# Altium PCB PCB1.PcbDoc (part 1 of 2)
Units mm, origin at the board's own origin, x right, y up, seen from the top; angles counter-clockwise.
Board outline 95 x 95 mm, 2 copper layers (Top Layer, Bottom Layer); 186 components, 106 nets, 634 pads, 261 vias.
Unrouted connection lines stored in the file: 17.
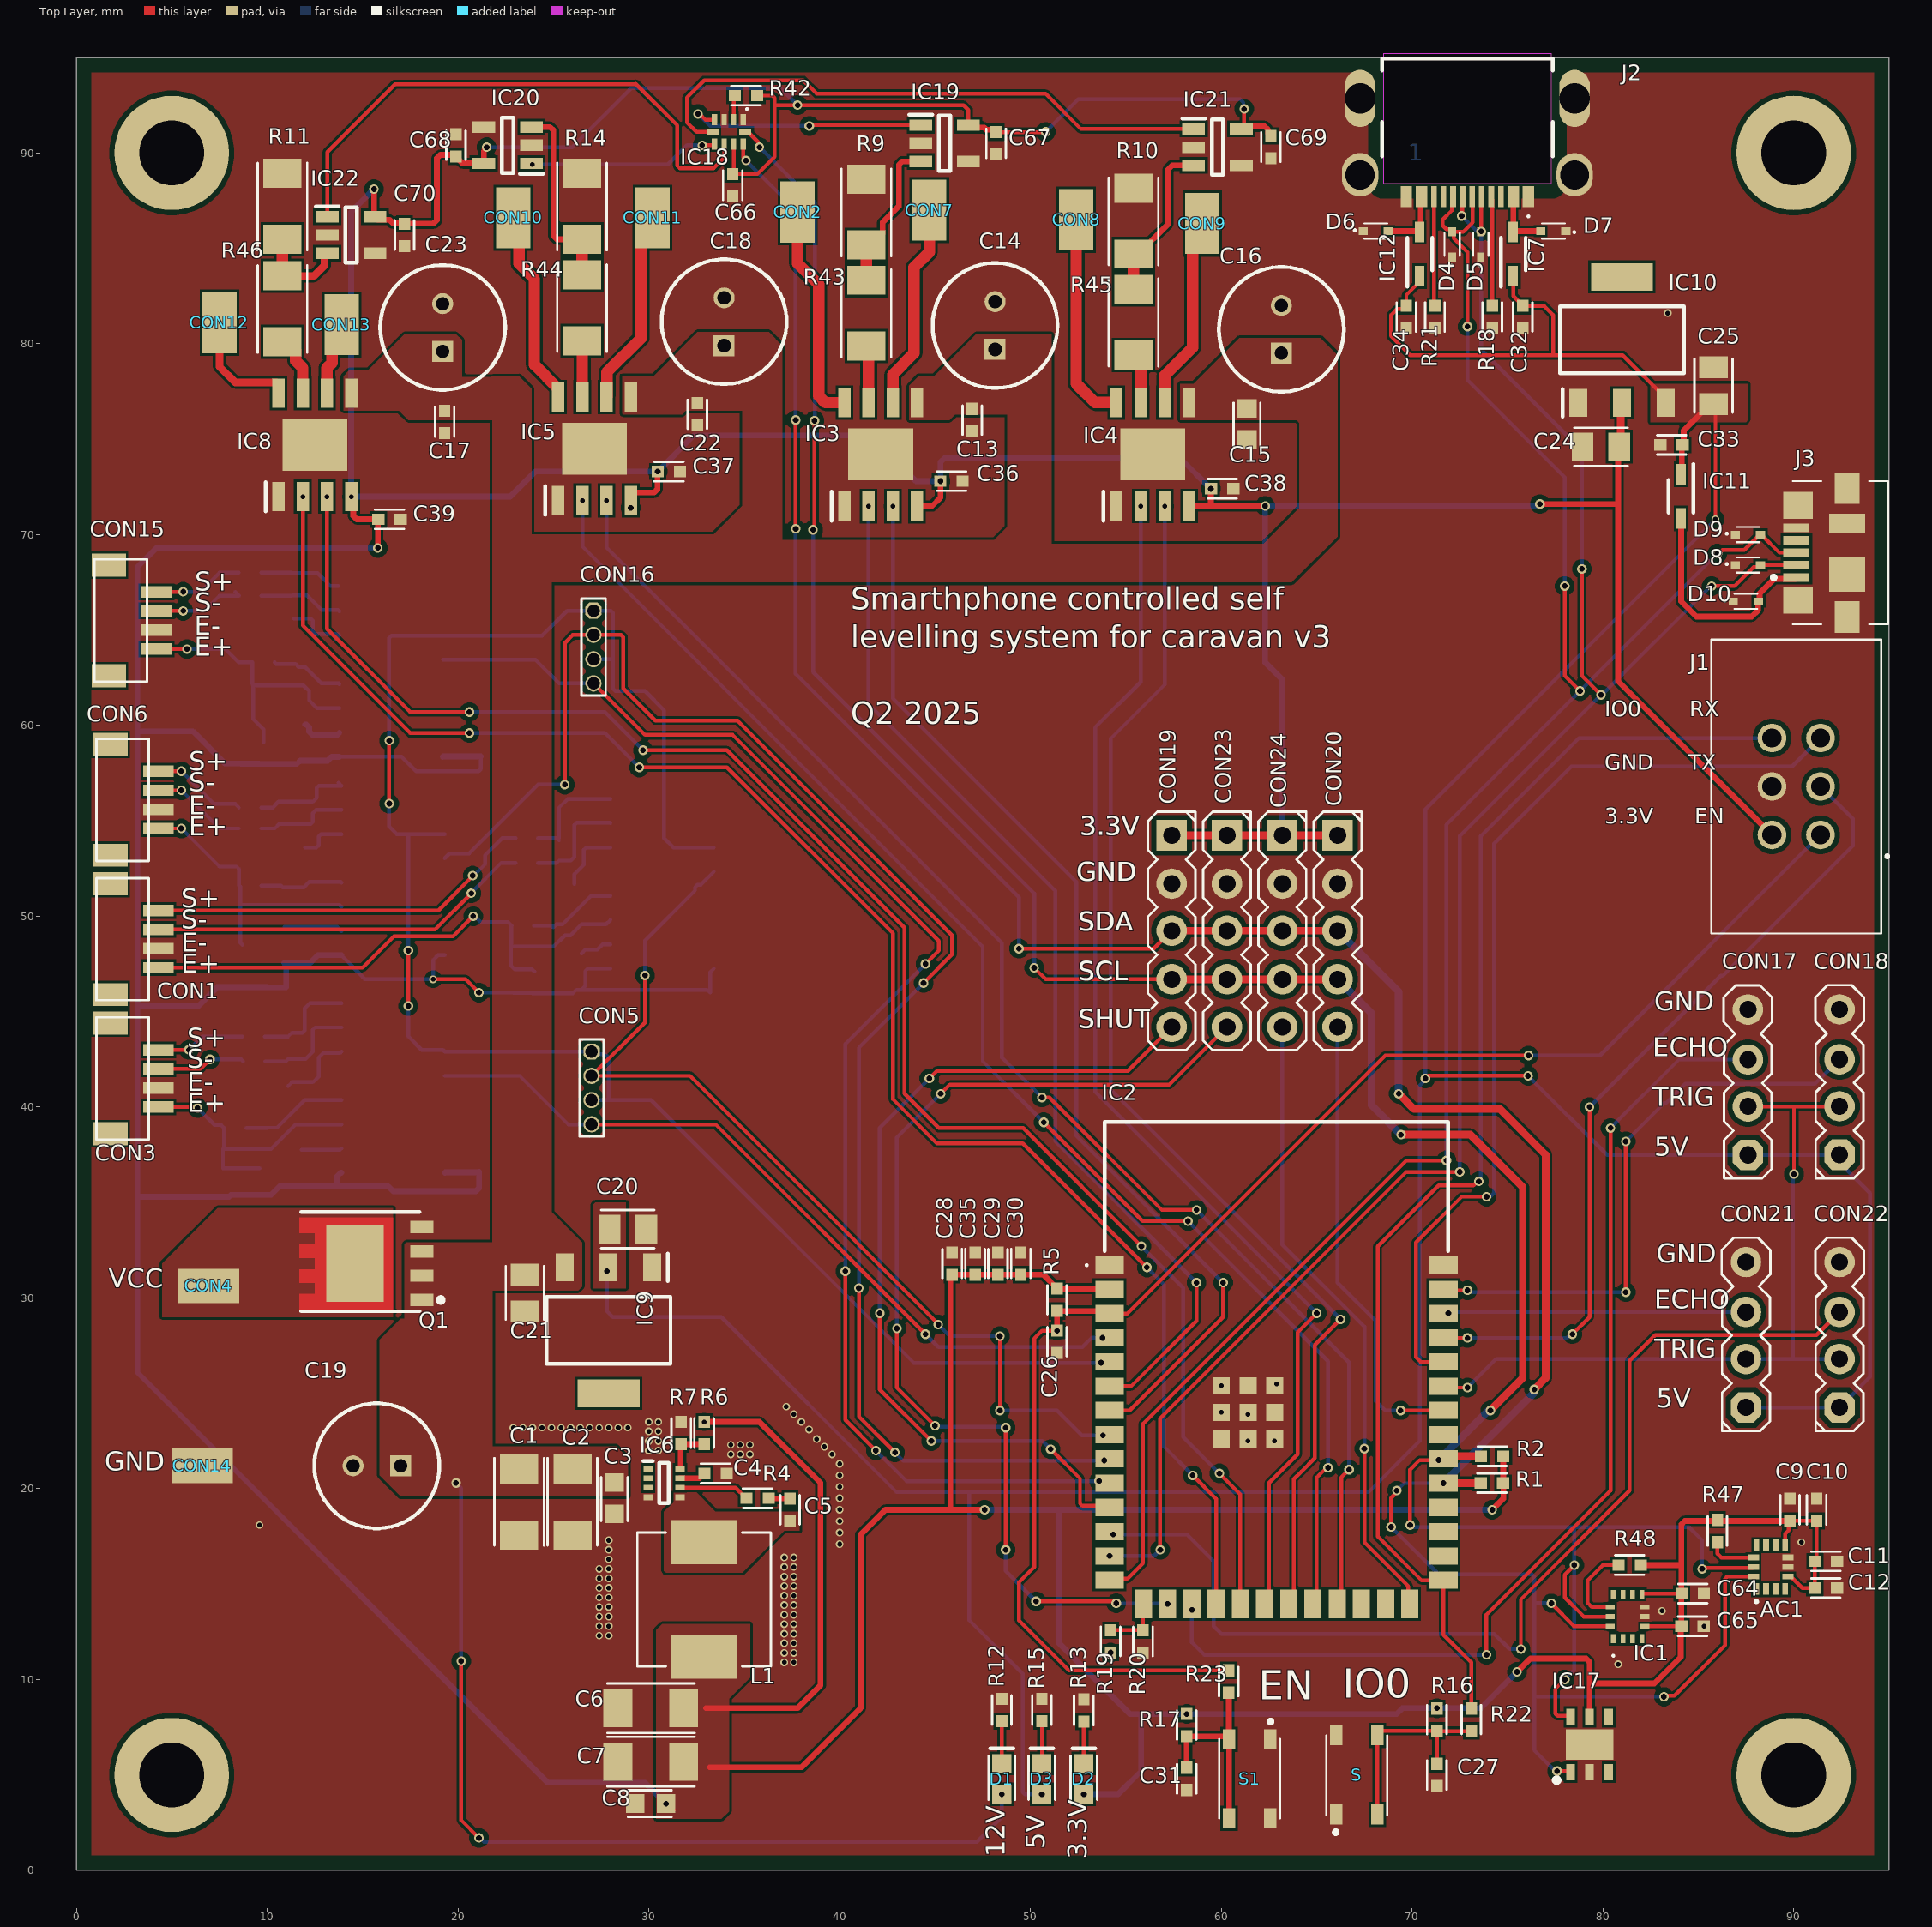
[diagram p0: Top Layer view]
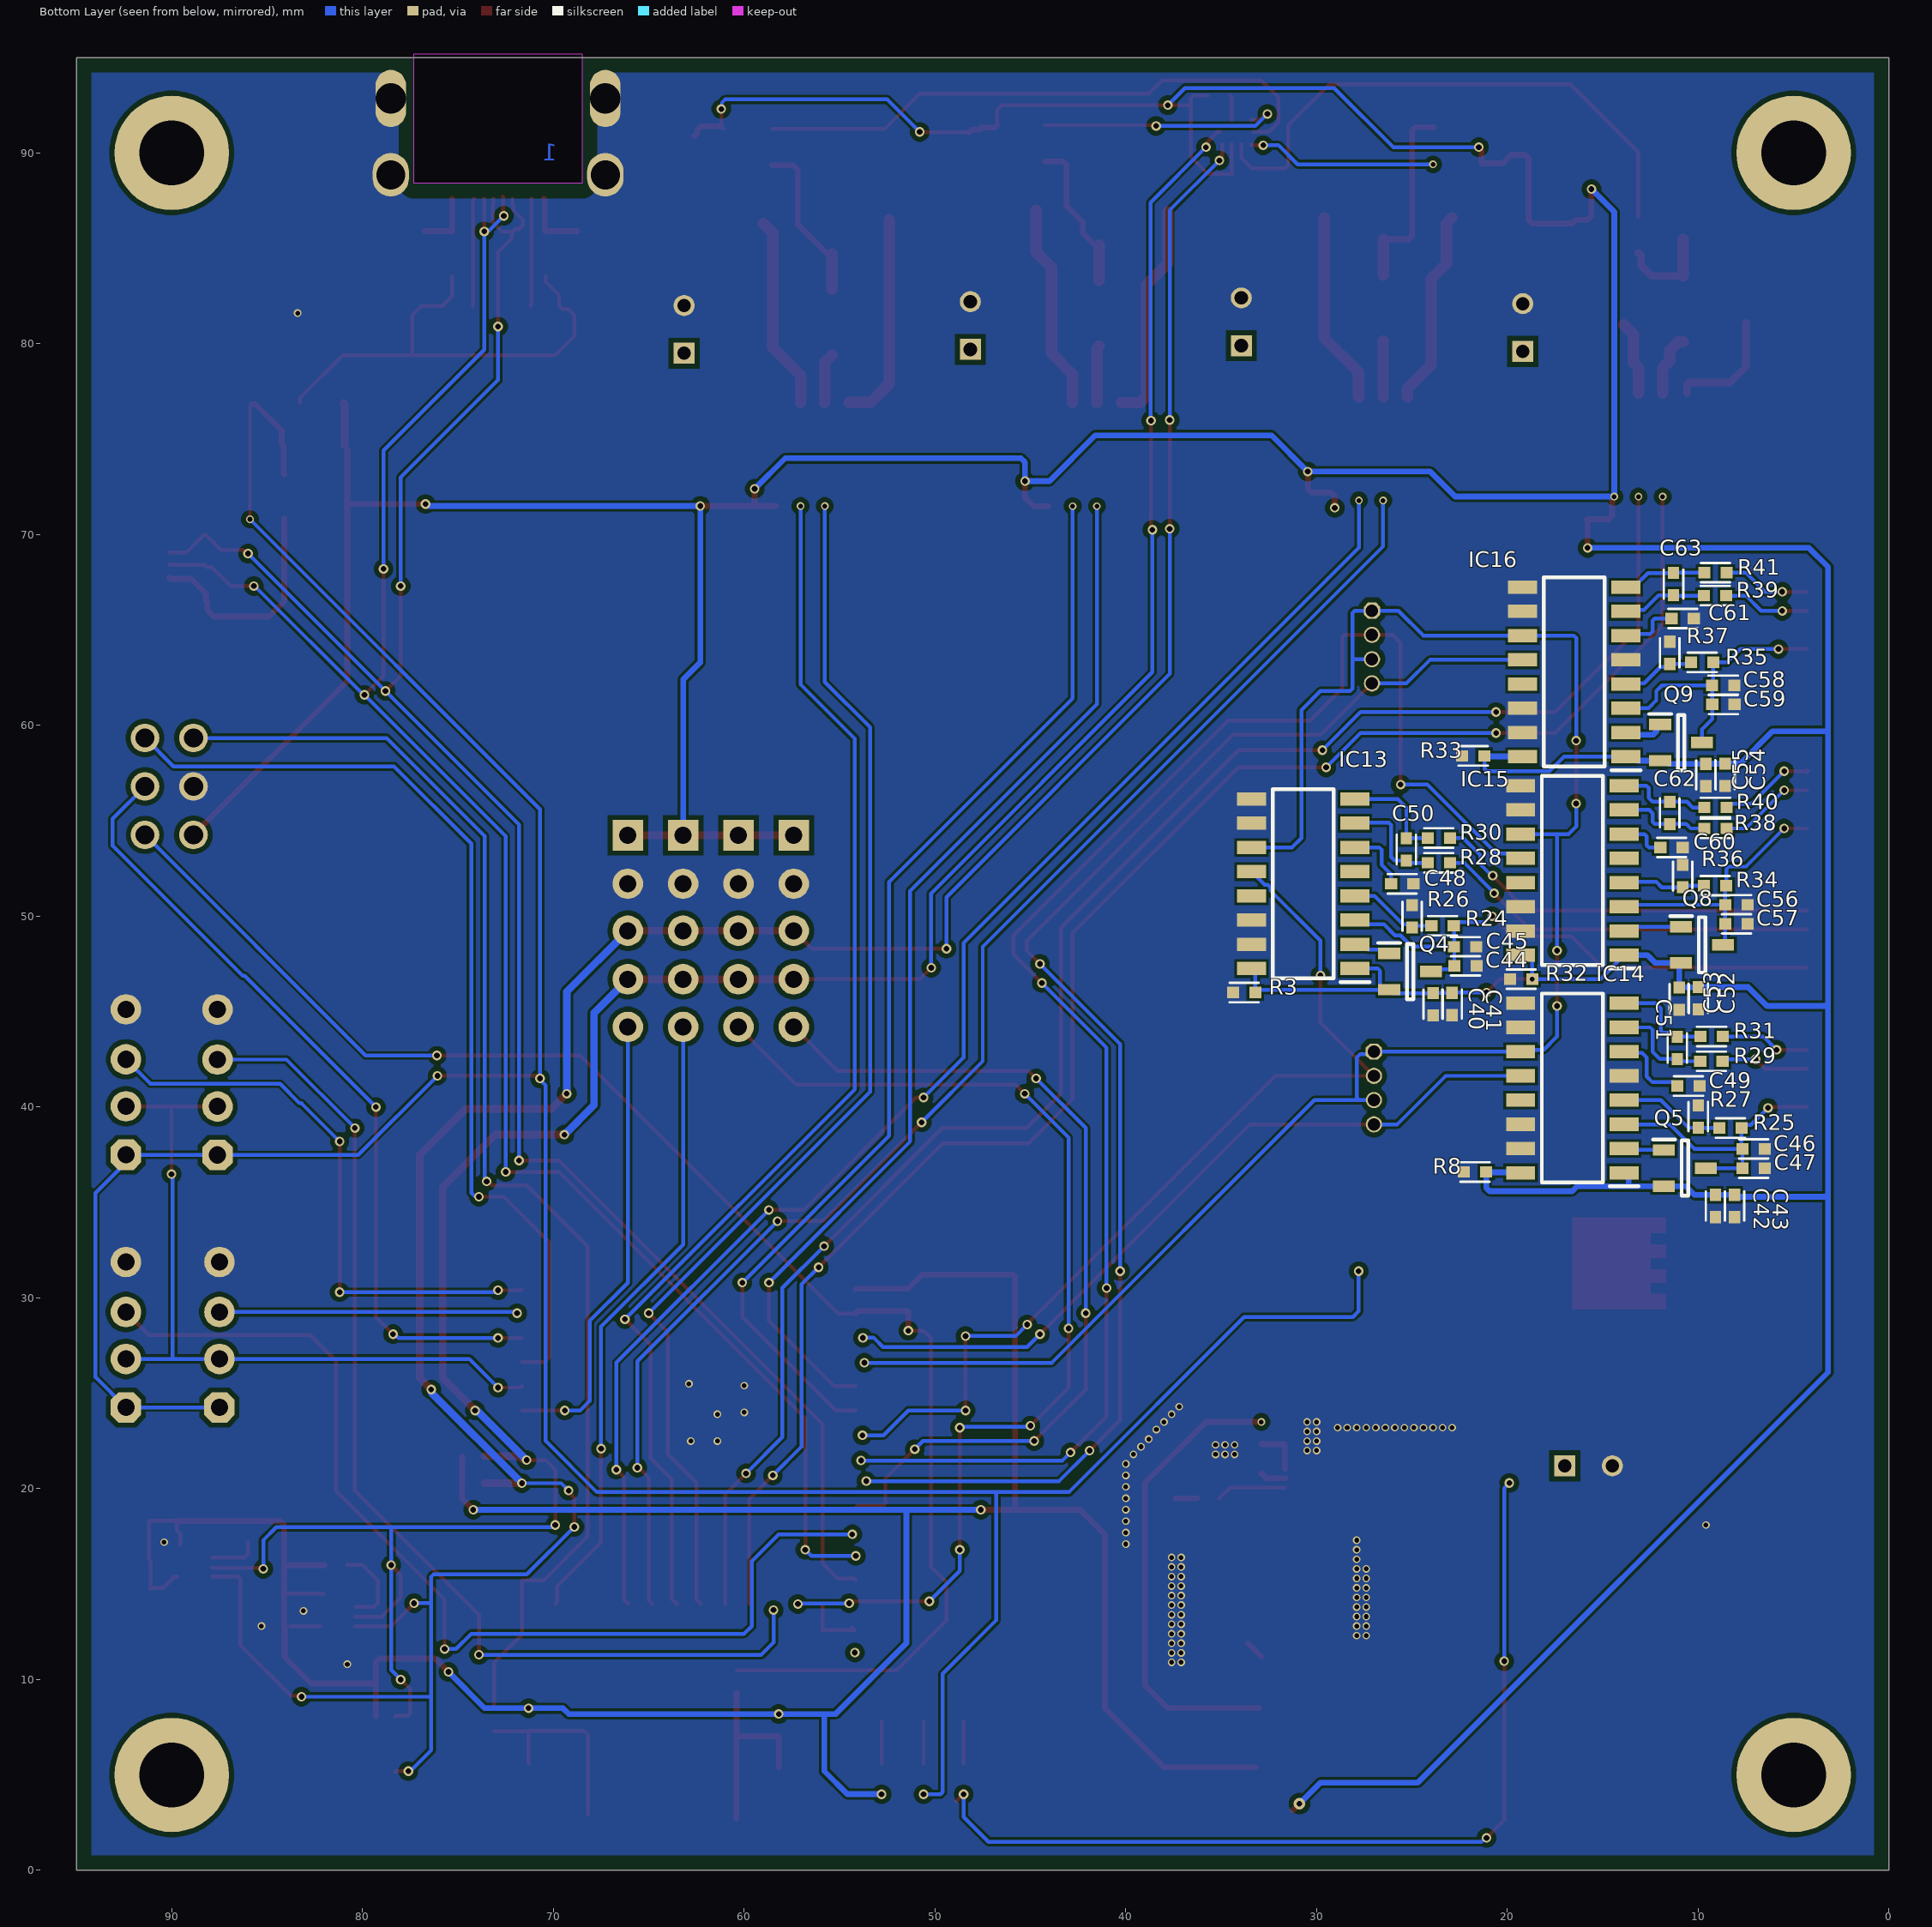
[diagram p1: Bottom Layer view, seen from below]
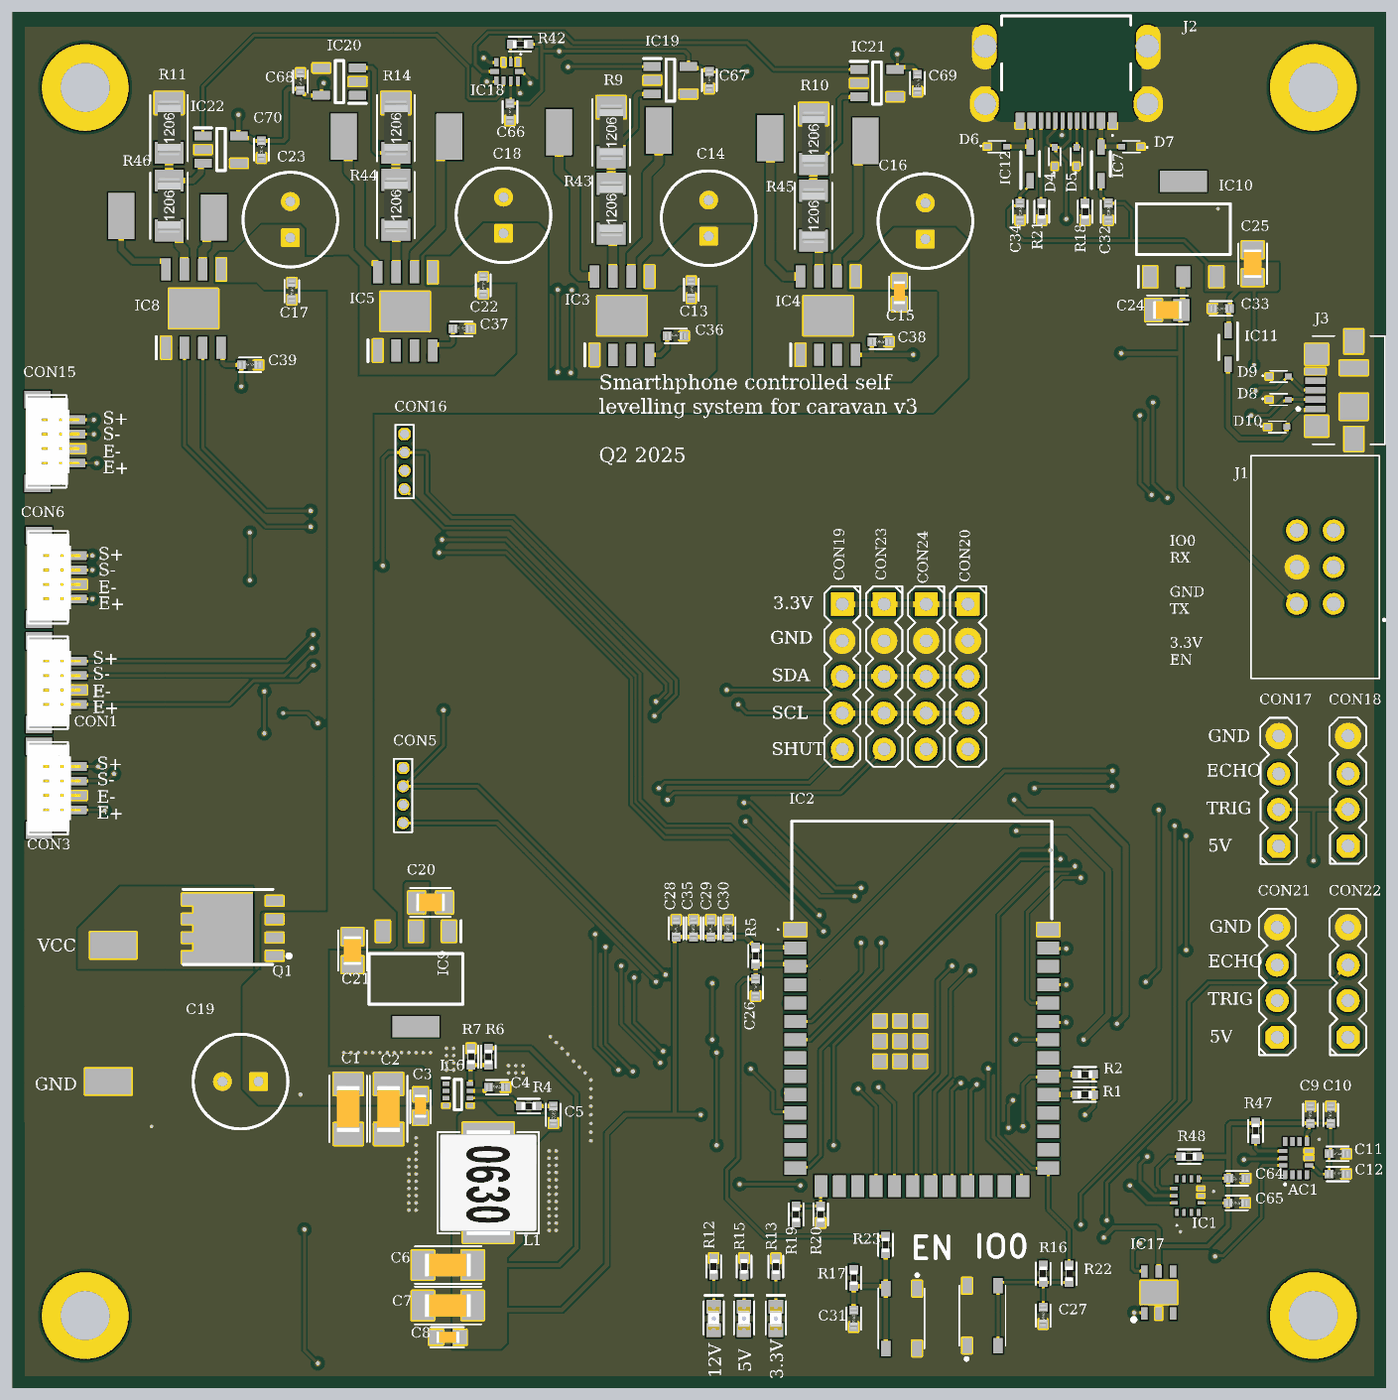
[diagram p3: 3D render of the assembled board from above, using the file's embedded part models]
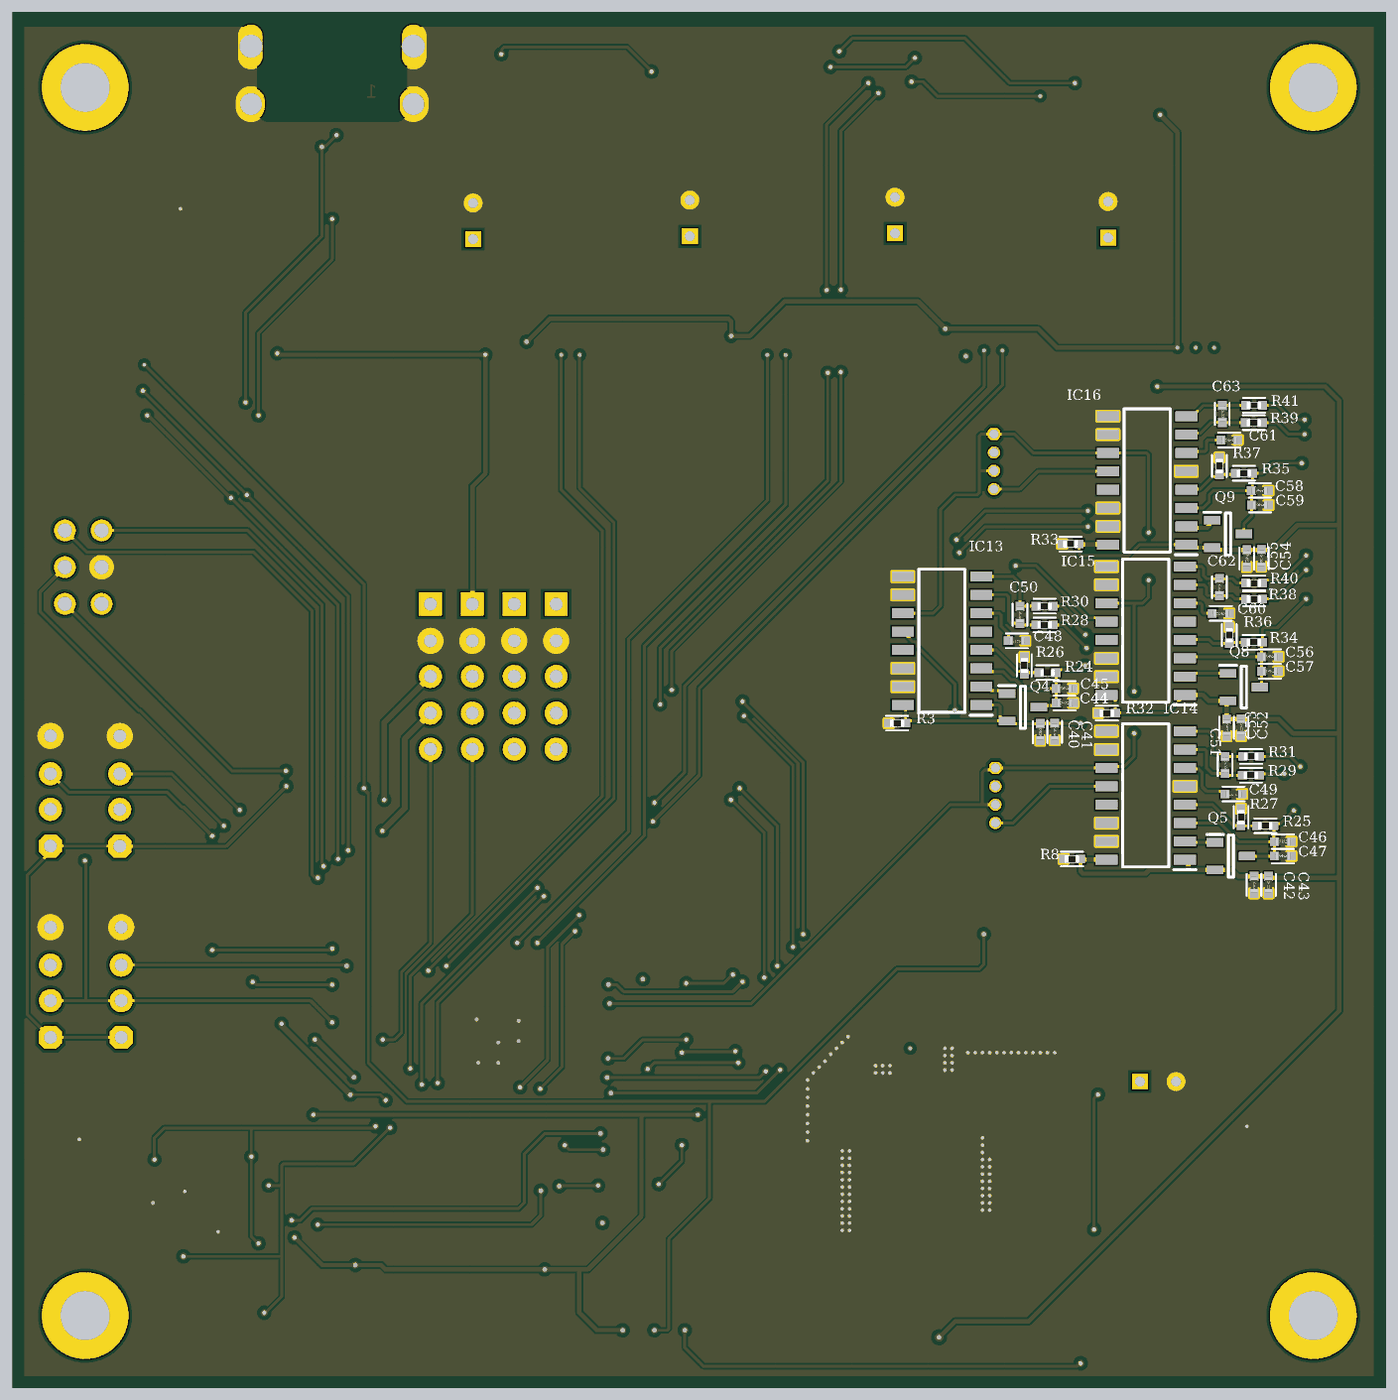
[diagram p4: 3D render of the assembled board from below, using the file's embedded part models]

## Layer stack, top to bottom
Top Solder: solder mask 0.0102, Solder Resist, Dk 3.5
Top Layer: signal copper 0.0356
Dielectric 1: dielectric 0.32, FR-4, Dk 4.8
Bottom Layer: signal copper 0.0356
Bottom Solder: solder mask 0.0102, Solder Resist, Dk 3.5

## Board outline
0,0 95,0 95,95 0,95
cut-out: 68.5,95.2 68.5,88.4 77.3,88.4 77.3,95.2

## Design rules (kind name [scope] priority, off if disabled: settings)
BoardOutlineClearance [All] p1: gap=0.8 ignorepadtopadclearanceinfootprint=FALSE
Clearance [All] p1: gap=0.127 ignorepadtopadclearanceinfootprint=TRUE except(0.2: Arc-THPad Track-THPad SMDPad-THPad; 0.254: THPad-Fill THPad-Poly THPad-Region Via-Fill Via-Poly Via-Region; 0.33: Arc-Hole Track-Hole SMDPad-Hole THPad-Hole Via-Hole Fill-Hole Poly-Hole Region-Hole; 0.5: THPad-THPad)
HoleSize [All] p1: absolutevalues=TRUE maxlimit=4 minlimit=0.02 maxpercent=80.000 minpercent=20.000
HoleToHoleClearance [All] p1: gap=0.127 allowstackedmicrovias=TRUE
PlaneClearance [All] p1: clearance=0.3
PlaneConnect PlaneConnect_1 [(HasFootprint('R 2512'))] p1: planeconnectstyle=Relief reliefexpansion=0.508 reliefentries=4 reliefconductorwidth=0.254 reliefairgap=0.254
PlaneConnect [All] p2: planeconnectstyle=Relief reliefexpansion=0.508 reliefentries=4 reliefconductorwidth=0.254 reliefairgap=0.254
PolygonConnect "Polygon Power Connection" [(HasFootprint('DFN 5x6')) OR  (HasFootprint('R 2512')) OR  IsVia OR  HasFootprint('SMD PAD')  OR  (HasFootprint('DJNR60454R5FERROCORE'))  OR  (HasFootprint ('SON50P200X200X80-9N-D')) OR (HasFootprint('SOT230P700X180-4N'))  OR    InNetClass('Power')] p1: connectstyle=Direct reliefconductorwidth=0.254 reliefentries=4 polygonreliefangle="90 Angle" airgapwidth=0.254 // Conection to high power components
PolygonConnect [All] p2: connectstyle=Direct reliefconductorwidth=0.254 reliefentries=4 polygonreliefangle="90 Angle" airgapwidth=0.254
RoutingVias [All] p1: holewidth=0.3 width=0.5 viastyle="Through Hole" minholewidth=0.2 minwidth=0.3 maxholewidth=1 maxwidth=1.27
SilkToSilkClearance [All] p1: silktosilkclearance=0.127
SolderMaskExpansion "Tented Vias" [IsVia] p1: expansion=0.102 istentingtop=TRUE
SolderMaskExpansion [All] p2: expansion=0.102 istentingtop=FALSE
Width [All] p1: maxlimit=1 minlimit=0.127 preferedwidth=0.3 minimp=50.000000 maximp=50.000000 favimp=50.000000
25 further rules are at their usual default settings.

## Classes and differential pairs
component class Sensors: AC1 C9 C10 C11 C12 C64 C65 CON17 CON18 CON19 CON20 CON21 CON22 CON23 CON24 IC1 IC17 R47 R48
component class Amplifiers2: C52 C53 C54 C55 C56 C57 C58 C59 C60 C61 C62 C63 CON6 CON15 CON16 IC15 IC16 Q8 Q9 R32 R33 R34 R35 R36 R37 R38 R39 R40 R41
component class Amplifiers1: C40 C41 C42 C43 C44 C45 C46 C47 C48 C49 C50 C51 CON1 CON3 CON5 IC13 IC14 Q4 Q5 R3 R8 R24 R25 R26 R27 R28 R29 R30 R31
component class INTERFACE: C32 C33 C34 D4 D5 D6 D7 D8 D9 D10 IC7 IC11 IC12 J1 J2 J3 R18 R21
component class MCU: C26 C27 C28 C29 C30 C31 C35 C66 IC2 IC18 R1 R2 R5 R16 R17 R19 R20 R22 R23 R42 S S1
component class DC_DRIVERS: C13 C14 C15 C16 C17 C18 C22 C23 C36 C37 C38 C39 C67 C68 C69 C70 CON2 CON7 CON8 CON9 CON10 CON11 CON12 CON13 IC3 IC4 IC5 IC8 IC19 IC20 IC21 IC22 R9 R10 R11 R14 R43 R44 R45 R46
component class DC-DC: C1 C2 C3 C4 C5 C6 C7 C8 C19 C20 C21 C24 C25 CON4 CON14 D1 D2 D3 IC6 IC9 IC10 L1 Q1 R4 R6 R7 R12 R13 R15

## Components (designator, comment, footprint, x,y, rotation, side; value= is the part's Value field where it differs from the comment)
AC1 "LSM6DSOXTR" LGA-14_1 88.8,15.9 r90 top
C1 "10uF" "C 1206" 23.2,19.3 r270 top
C2 "10uF" "C 1206" 26,19.3 r270 top
C3 "100nF" "C 0603" 28.2,19.5 r270 top
C4 "33nF" "C 0402" 33.5,20.8 r0 top
C5 "100nF" "C 0402" 37.4,18.9 r270 top
C6 "40uF" "C 1206" 30.1,8.5 r180 top
C7 "40uF" "C 1206" 30.1,5.7 r180 top
C8 "100nF" "C 0603" 30.1,3.5 r180 top
C9 "100nF" "C 0402" 89.8,18.9 r90 top
C10 "1uF" "C 0402" 91.2,18.9 r90 top
C11 "1uF" "C 0402" 91.684,16.2 r0 top
C12 "100nF" "C 0402" 91.684,14.8 r0 top
C13 "0.1uF" "C 0402" 46.95,76 r270 top
C14 "UVY1V101MED1TD" CAPPRD250W50D655H1250 48.15,79.7 r90 top
C15 "0.1uF" "C 0603" 61.35,75.8 r270 top
C16 "UVY1V101MED1TD" CAPPRD250W50D655H1250 63.15,79.5 r90 top
C17 "0.1uF" "C 0402" 19.3,75.9 r270 top
C18 "UVY1V101MED1TD" CAPPRD250W50D655H1250 33.95,79.9 r90 top
C19 "UVY1V101MED1TD" CAPPRD250W50D655H1250 17,21.2 r180 top
C20 "22uF" "C 0805" 28.9,33.6 r0 top
C21 "10uF" "C 0805" 23.5,30.265 r270 top
C22 "0.1uF" "C 0402" 32.55,76.3 r270 top
C23 "UVY1V101MED1TD" CAPPRD250W50D655H1250 19.2,79.6 r90 top
C24 "22uF" "C 0805" 79.9,74.6 r180 top
C25 "10uF" "C 0805" 85.8,77.8 r90 top
C26 "1uF" "C 0402" 51.4,27.7 r270 top
C27 "0.1uF" "C 0402" 71.3,5 r270 top
C28 "100nF" "C 0402" 45.9,31.8 r90 top
C29 "10uF" "C 0402" 48.3,31.8 r90 top
C30 "0.1uF" "C 0402" 49.5,31.8 r90 top
C31 "0.1uF" "C 0402" 58.188,4.797 r270 top
C32 "10uF" "C 0402" 75.8,81.4 r270 top
C33 "10uF" "C 0402" 83.6,74.7 r180 top
C34 "10uF" "C 0402" 69.7,81.4 r270 top
C35 "1uF" "C 0402" 47.1,31.8 r90 top
C36 "100nF" "C 0402" 45.866,72.8 r0 top
C37 "100nF" "C 0402" 31.05,73.3 r0 top
C38 "100nF" "C 0402" 60.05,72.4 r0 top
C39 "100nF" "C 0402" 16.416,70.8 r0 top
C40 "1uF" "C 0402" 23.9,45.384 r270 bottom
C41 "100nF" "C 0402" 22.9,45.4 r270 bottom
C42 "1uF" "C 0402" 9.1,34.816 r270 bottom
C43 "100nF" "C 0402" 8.1,34.816 r270 bottom
C44 "100nF" "C 0402" 22.2,47.4 r180 bottom
C45 "10uF" "C 0402" 22.216,48.4 r180 bottom
C46 "100nF" "C 0402" 7.1,37.8 r180 bottom
C47 "10uF" "C 0402" 7.1,36.8 r180 bottom
C48 "100nF" "C 0402" 25.516,51.7 r0 bottom
C49 "100nF" "C 0402" 10.516,41.1 r0 bottom
C50 "100nF" "C 0402" 25.3,53.5 r270 bottom
C51 "100nF" "C 0402" 11.1,43.1 r270 bottom
C52 "1uF" "C 0402" 10,45.7 r270 bottom
C53 "100nF" "C 0402" 11,45.684 r270 bottom
C54 "1uF" "C 0402" 9.6,57.4 r270 bottom
C55 "100nF" "C 0402" 8.6,57.416 r270 bottom
C56 "100nF" "C 0402" 8,50.6 r180 bottom
C57 "10uF" "C 0402" 8,49.6 r180 bottom
C58 "100nF" "C 0402" 8.7,62.1 r180 bottom
C59 "10uF" "C 0402" 8.684,61.1 r180 bottom
C60 "100nF" "C 0402" 11.4,53.6 r0 bottom
C61 "100nF" "C 0402" 10.816,65.6 r0 bottom
C62 "100nF" "C 0402" 11.5,55.416 r270 bottom
C63 "100nF" "C 0402" 11.3,67.4 r270 bottom
C64 "100nF" "C 0402" 84.716,14.5 r180 top
C65 "100nF" "C 0402" 84.7,12.8 r0 top
C66 "0.1uF" "C 0402" 34.4,88.3 r270 top
C67 "100nF" "C 0402" 48.2,90.5 r270 top
C68 "100nF" "C 0402" 19.9,90.4 r90 top
C69 "100nF" "C 0402" 62.6,90.3 r270 top
C70 "100nF" "C 0402" 17.2,85.7 r270 top
CON1 "4 PIN" BM04B-SRSS-TB 2.8,48.8 r90 top
CON2 "1 Pin" "SMD PAD" 37.8,86.9 r180 top
CON3 "4 PIN" BM04B-SRSS-TB 2.8,41.5 r90 top
CON4 "1 Pin" "SMD PAD" 6.942,30.628 r270 top
CON5 "4 PIN" "Goldpin 1.27mm 4PIN" 27,41 r270 top
CON6 "4 PIN" BM04B-SRSS-TB 2.8,56.1 r90 top
CON7 "1 Pin" "SMD PAD" 44.7,87 r180 top
CON8 "1 Pin" "SMD PAD" 52.4,86.5 r180 top
CON9 "1 Pin" "SMD PAD" 59,86.3 r180 top
CON10 "1 Pin" "SMD PAD" 22.9,86.6 r180 top
CON11 "1 Pin" "SMD PAD" 30.2,86.6 r180 top
CON12 "1 Pin" "SMD PAD" 7.5,81.1 r180 top
CON13 "1 Pin" "SMD PAD" 13.9,81 r180 top
CON14 "1 Pin" "SMD PAD" 6.6,21.2 r270 top
CON15 "4 PIN" BM04B-SRSS-TB 2.7,65.5 r90 top
CON16 "4 PIN" "Goldpin 1.27mm 4PIN" 27.1,64.105 r270 top
CON17 "4 PIN" "Goldpin 2.54 4P" 87.6,41.3 r90 top
CON18 "4 PIN" "Goldpin 2.54 4P" 92.4,41.31 r90 top
CON19 "5 PIN" "Goldpin 2.54mm  5Pin" 57.4,49.24 r270 top
CON20 "5 PIN" "Goldpin 2.54mm  5Pin" 66.1,49.24 r270 top
CON21 "4 PIN" "Goldpin 2.54 4P" 87.5,28.07 r90 top
CON22 "4 PIN" "Goldpin 2.54 4P" 92.4,28.07 r90 top
CON23 "5 PIN" "Goldpin 2.54mm  5Pin" 60.3,49.24 r270 top
CON24 "5 PIN" "Goldpin 2.54mm  5Pin" 63.2,49.24 r270 top
D1 "LED BLUE" "LED 0603 BLUE" 48.5,4.8 r90 top
D2 "LED BLUE" "LED 0603 BLUE" 52.8,4.8 r90 top
D3 "LED BLUE" "LED 0603 BLUE" 50.6,4.8 r90 top
D4 "LESD5D5.0CT1G" LESD5D50CT1G 72.1,85.2 r90 top
D5 "LESD5D5.0CT1G" LESD5D50CT1G 73.6,85.2 r90 top
D6 "LESD5D5.0CT1G" LESD5D50CT1G 68.1,85.9 r0 top
D7 "LESD5D5.0CT1G" LESD5D50CT1G 77.4,85.9 r180 top
D8 "LESD5D5.0CT1G" LESD5D50CT1G 87.6,68.4 r0 top
D9 "LESD5D5.0CT1G" LESD5D50CT1G 87.6,70 r0 top
D10 "LESD5D5.0CT1G" LESD5D50CT1G 87.5,66.5 r0 top
IC1 "BMI323" BMI323 81.3,13.3 r90 top
IC2 "ESP32-S3-WROOM-1-N16R8" ESP32S3WROOM1N16R8 62.9,26.46 r0 top
IC3 "DRV8251DDAR" SOIC127P600X170-9N 42.15,74.2 r90 top
IC4 "DRV8251DDAR" SOIC127P600X170-9N 56.411,74.206 r90 top
IC5 "DRV8251DDAR" SOIC127P600X170-9N 27.15,74.5 r90 top
IC6 "TPS62933DRLR" SOTFL50P160X60-8N 30.8,20.3 r0 top
IC7 "BAT760-7" SOD2513X120N 75.3,84.7 r90 top
IC8 "DRV8251DDAR" SOIC127P600X170-9N 12.5,74.7 r90 top
IC9 "AMS1117-5" SOT229P700X180-4N 27.89,28.3 r270 top
IC10 "AMS1117-3.3" SOT229P700X180-4N 81,80.2 r90 top
IC11 "BAT760-7" SOD2513X120N 84.1,72 r270 top
IC12 "BAT760-7" SOD2513X120N 70.4,84.7 r90 top
IC13 "HX711" SOIC127P600X160-16N 30.7,51.7 r0 bottom
IC14 "HX711" SOIC127P600X160-16N 16.6,41 r0 bottom
IC15 "HX711" SOIC127P600X160-16N 16.6,52.4 r0 bottom
IC16 "HX711" SOIC127P600X160-16N 16.5,62.8 r0 bottom
IC17 "HDC1080DMBR" SON100P300X300X80-7N-D 79.3,6.6 r90 top
IC18 "ADS1115IRUGR" ADS1115IRUGR 34.2,91.1 r180 top
IC19 "INA180A2IDBVR" SOT95P280X145-5N 45.5,90.5 r0 top
IC20 "INA180A2IDBVR" SOT95P280X145-5N 22.6,90.4 r180 top
IC21 "INA180A2IDBVR" SOT95P280X145-5N 59.8,90.3 r0 top
IC22 "INA180A2IDBVR" SOT95P280X145-5N 14.4,85.7 r0 top
J1 "09185066324" 09185066324 91.4,54.26 r90 top
J2 "USB4500-03-0-A" USB4500030A 72.9,91.7 r180 top
J3 "0473461001" 0473461001 92.115,69.05 r90 top
L1 "4.7uH" HPI0630 32.9,14.2 r270 top
Q1 "AON6403" "DFN 5x6" 15.2,31.8 r90 top
Q4 "S8550" SOT95P240X110-3N 25.1,47.1 r180 bottom
Q5 "S8550" SOT95P240X110-3N 10.7,36.8 r180 bottom
Q8 "S8550" SOT95P240X110-3N 9.8,48.5 r180 bottom
Q9 "S8550" SOT95P240X110-3N 10.9,59.1 r180 bottom
R1 "10k" "R 0402" 74.184,20.3 r0 top
R2 "10k" "R 0402" 74.2,21.7 r0 top
R3 "10k" "R 0402" 33.8,46 r180 bottom
R4 "0" "R 0402" 35.7,19.5 r180 top
R5 "10k" "R 0402" 51.4,29.9 r90 top
R6 "31.3K" "R 0402" 32.9,22.916 r270 top
R7 "10K" "R 0402" 31.7,22.916 r270 top
R8 "10k" "R 0402" 21.7,36.6 r180 bottom
R9 "0.05R" "R 1206" 41.4,86.9 r90 top
R10 "0.05R" "R 1206" 55.4,86.427 r90 top
R11 "0.05R" "R 1206" 10.8,87.2 r90 top
R12 "2k" "R 0402" 48.5,8.4 r270 top
R13 "160" "R 0402" 52.8,8.384 r270 top
R14 "0.05R" "R 1206" 26.5,87.2 r90 top
R15 "160" "R 0402" 50.6,8.4 r270 top
R16 "10k" "R 0402" 71.3,7.9 r90 top
R17 "10k" "R 0402" 58.188,7.613 r90 top
R18 "10k" "R 0402" 74.2,81.4 r90 top
R19 "47k" "R 0402" 54.2,12 r270 top
R20 "13k" "R 0402" 55.9,12 r90 top
R21 "10k" "R 0402" 71.2,81.4 r90 top
R22 "100R" "R 0402" 73.1,7.9 r270 top
R23 "100R" "R 0402" 60.387,9.897 r270 top
R24 "20k" "R 0402" 23.4,49.5 r180 bottom
R25 "20k" "R 0402" 8.316,38.9 r180 bottom
R26 "8.2k" "R 0402" 25,50 r270 bottom
R27 "8.2k" "R 0402" 10,39.5 r270 bottom
R28 "100R" "R 0402" 23.6,52.8 r180 bottom
R29 "100R" "R 0402" 9.316,42.4 r180 bottom
R30 "100R" "R 0402" 23.6,54.1 r180 bottom
R31 "100R" "R 0402" 9.3,43.7 r180 bottom
R32 "10k" "R 0402" 19.284,46.7 r180 bottom
R33 "10k" "R 0402" 21.8,58.4 r180 bottom
R34 "20k" "R 0402" 9.116,51.6 r180 bottom
R35 "20k" "R 0402" 9.8,63.3 r180 bottom
R36 "8.2k" "R 0402" 10.816,52.1 r270 bottom
R37 "8.2k" "R 0402" 11.5,63.8 r270 bottom
R38 "100R" "R 0402" 9.1,54.6 r180 bottom
R39 "100R" "R 0402" 9.116,66.8 r180 bottom
R40 "100R" "R 0402" 9.1,55.7 r180 bottom
R41 "100R" "R 0402" 9.1,68 r180 bottom
R42 "10k" "R 0402" 35.1,93 r0 top
R43 "0.05R" "R 1206" 41.4,81.6 r90 top
R44 "0.05R" "R 1206" 26.5,81.873 r90 top
R45 "0.05R" "R 1206" 55.4,81.127 r90 top
R46 "0.05R" "R 1206" 10.8,81.827 r90 top
R47 "0R" "R 0402" 86,17.784 r90 top
R48 "0R" "R 0402" 81.4,16 r0 top
S "PTS810SJK250SMTRLFS" PTS810SJG250SMTRLFS 67.1,5 r90 top
S1 "PTS810SJK250SMTRLFS" PTS810SJG250SMTRLFS 61.487,4.797 r270 top

## Footprints (in the part's own frame and the unit in brackets; to place one, negate y for a bottom-side part, rotate by r counter-clockwise, add the part's x,y. Pads: shape width x height; smd on the part's side, far side on the other; paste and mask are expansions set on the pad)
0473461001 [mm]
  rect 0.45x1.38 smd: 1(-1.3,1.975) 2(-0.65,1.975) 3(0,1.975) 4(0.65,1.975) 5(1.3,1.975)
  rect 1.425x1.55 smd: MP1(-2.487,1.89) MP2(2.487,1.89)
  rect 1.65x1.3 smd: MP3(-3.375,-0.685) MP6(3.375,-0.685)
  rect 1.8x1.9 smd: MP4(-1.15,-0.685)
  rect 1x1.9 smd: MP5(1.55,-0.685)
  silkscreen extent -3.75,-2.84 3.75,3.26, body extent -3.9,-2.5 3.9,2.5, height 2.72
09185066324 [mm]
  round 1.5 hole 1: 1(0,0) 2(0,2.54) 3(2.54,0) 4(2.54,2.54) 5(5.08,0) 6(5.08,2.54)
  silkscreen extent -5.16,-3.55 10.24,5.72, body extent -5.16,-3.21 10.24,5.99, height 9.31
ADS1115IRUGR [mm]
  rect 0.3x0.575 smd: 1(-0.75,-0.638) 4(0.75,-0.638) 6(0.75,0.638) 9(-0.75,0.638)
  rect 0.25x0.575 smd: 2(-0.25,-0.638) 3(0.25,-0.638) 7(0.25,0.638) 8(-0.25,0.638)
  rect 0.63x0.35 smd: 5(0.86,0) 10(-0.86,0)
  silkscreen extent -1,-1.25 -0.9,-1.15, body extent -1,-0.75 1,0.75, height 0.4
BM04B-SRSS-TB [mm]
  rect 0.6x1.6 smd: 1(-1.5,-1.5) 2(-0.5,-1.5) 3(0.5,-1.5) 4(1.5,-1.5)
  rect 1.2x1.8 smd: A(-2.9,1) B(2.9,1)
  silkscreen extent -3.2,-1 3.2,1.75, body extent -3,-1.9 3,1.7, height 4.25
BMI323 [mm]
  rect 0.475x0.25 smd: 1(-1.163,0.75) 2(-1.163,0.25) 3(-1.163,-0.25) 4(-1.163,-0.75) 8(1.163,-0.75) 9(1.163,-0.25) 10(1.163,0.25) 11(1.163,0.75)
  rect 0.25x0.475 smd: 5(-0.5,-0.913) 6(0,-0.913) 7(0.5,-0.913) 12(0.5,0.913) 13(0,0.913) 14(-0.5,0.913)
  silkscreen extent -2.1,0.7 -2,0.8, body extent -1.5,-1.25 1.5,1.25, height 0.84
"C 0402" [mm] "MLCC Capacitor 0402"
  rect 0.635x0.6 smd: 1(-0.584,0) 2(0.584,0)
  silkscreen extent -0.76,-0.51 0.76,0.51, body extent -0.76,-0.25 0.74,0.25, height 0.35
"C 0603" [mil]
  rect 38x39.37 smd: 1(-32,0) 2(32,0)
  silkscreen extent -43,-28 47,28, body extent -31,-16 31,16, height 24
"C 0805" [mil]
  rect 45x59.06 smd: 1(-38,0) 2(38,0)
  silkscreen extent -55,-39 55,39, body extent -39,-25 39,25, height 49
"C 1206" [mil]
  rect 60x78.74 smd: 1(-68,0) 2(68,0)
  silkscreen extent -91,-51 89,51, body extent -63,-31 63,31, height 59
CAPPRD250W50D655H1250 [mm]
  rect 1.1x1.1 hole 0.7: 1(0,0)
  round 1.1 hole 0.7: 2(2.5,0)
  silkscreen extent -2.02,-3.27 4.52,3.27, body extent -2.15,-3.4 4.65,3.4, height 12.5
"DFN 5x6" [mm] "PowerMOSFET"
  rect 0.65x1.2 smd: 1(-1.905,-2.91) 2(-0.635,-2.91) 3(0.635,-2.91) 4(1.905,-2.91)
  rect 4x3 smd: 5_8(0,0.6)
  Top Layer region: -2.4,-1.4 -2.4,3.5 -1.6,3.5 -1.6,2.7 -1,2.7 -1,3.5 -0.3,3.5 -0.3,2.7 0.3,2.7 0.3,3.5 1,3.5 1,2.7 1.6,2.7 1.6,3.5 2.4,3.5 2.4,-1.4
  silkscreen extent -2.5,-4.03 2.7,3.42, body extent -2.5,-3.27 2.5,3.26, height 1.2
ESP32S3WROOM1N16R8 [mm]
  rect 1.5x0.9 smd: 1(-8.75,5.26) 2(-8.75,3.99) 3(-8.75,2.72) 4(-8.75,1.45) 5(-8.75,0.18) 6(-8.75,-1.09) 7(-8.75,-2.36) 8(-8.75,-3.63) 9(-8.75,-4.9) 10(-8.75,-6.17) 11(-8.75,-7.44) 12(-8.75,-8.71) 13(-8.75,-9.98) 14(-8.75,-11.25) 27(8.75,-11.25) 28(8.75,-9.98) 29(8.75,-8.71) 30(8.75,-7.44) 31(8.75,-6.17) 32(8.75,-4.9) 33(8.75,-3.63) 34(8.75,-2.36) 35(8.75,-1.09) 36(8.75,0.18) 37(8.75,1.45) 38(8.75,2.72) 39(8.75,3.99) 40(8.75,5.26)
  rect 0.9x1.5 smd: 15(-6.985,-12.5) 16(-5.715,-12.5) 17(-4.445,-12.5) 18(-3.175,-12.5) 19(-1.905,-12.5) 20(-0.635,-12.5) 21(0.635,-12.5) 22(1.905,-12.5) 23(3.175,-12.5) 24(4.445,-12.5) 25(5.715,-12.5) 26(6.985,-12.5)
  rect 0.9x0.9 smd: 41(-1.5,-2.46) 42(-2.9,-1.06) 43(-2.9,-2.46) 44(-2.9,-3.86) 45(-1.5,-3.86) 46(-0.1,-3.86) 47(-0.1,-2.46) 48(-0.1,-1.06) 49(-1.5,-1.06)
  silkscreen extent -10,5.21 9,12.75, body extent -9,0 9,3.25, height 12.75
"Goldpin 1.27mm 4PIN" [mm]
  oct 0.85x0.85 hole 0.65: 1(-1.905,0)
  round 0.85 hole 0.65: 2(-0.635,0) 3(0.635,0) 4(1.905,0)
  silkscreen extent -2.54,-0.64 2.54,0.64
"Goldpin 2.54 4P" [mm]
  oct 1.6x1.6 hole 0.9: 1(-3.81,0)
  round 1.6 hole 0.9: 2(-1.27,0) 3(1.19,0) 4(3.81,0)
  silkscreen extent -5.04,-1.27 5.08,1.27
"Goldpin 2.54mm  5Pin" [mm]
  rect 1.6x1.6 hole 0.9: 1(-5,0)
  round 1.6 hole 0.9: 2(-2.46,0) 3(0,0) 4(2.54,0) 5(5.04,0)
  silkscreen extent -6.23,-1.25 6.25,1.25
HPI0630 [mm] "Power Inductor"
  rect 2.3x3.5 smd: 1(-3,0) 2(3,0)
  silkscreen extent -3.5,-3.5 3.5,3.5, body extent -3.65,-3.35 3.65,3.35, height 2.81
"LED 0603 BLUE" [mil]
  rect 38x39.37 smd: 1(-32,0) 2(32,0)
  silkscreen extent -43,-28 63,28, body extent -31,-16 31,16, height 22
LESD5D50CT1G [mm]
  rect 0.48x0.4 smd: 1(-0.66,0) 2(0.66,0)
  silkscreen extent -1.15,-0.4 0.6,0.4, body extent -0.8,-0.4 0.8,0.4, height 0.6
LGA-14_1 [mm]
  rect 0.6x0.3 smd: 1(-1.15,0.75) 2(-1.15,0.25) 3(-1.15,-0.25) 4(-1.15,-0.75) 8(1.15,-0.75) 9(1.15,-0.25) 10(1.15,0.25) 11(1.15,0.75)
  rect 0.3x0.6 smd: 5(-0.5,-0.9) 6(0,-0.9) 7(0.5,-0.9) 12(0.5,0.9) 13(0,0.9) 14(-0.5,0.9)
  silkscreen extent -1.83,0.74 -1.8,0.77, body extent -1.62,-1.25 1.38,1.25, height 0.86
PTS810SJG250SMTRLFS [mm]
  rect 1.05x0.65 smd: 1(-2.075,1.075) 2(2.075,1.075) 3(-2.075,-1.075) 4(2.075,-1.075)
  silkscreen extent -3.1,-1.6 2.07,1.6
"R 0402" [mm] "0402 resistor Chip"
  rect 0.635x0.6 smd: 1(-0.584,0) 2(0.584,0)
  silkscreen extent -0.76,-0.51 0.76,0.51, body extent -0.5,-0.25 0.5,0.25, height 0.31
"R 1206" [mil]
  rect 60x78.74 smd: 1(-68,0) 2(68,0)
  silkscreen extent -91,-51 89,51, body extent -75,-32 75,31, height 24
"SMD PAD" [mm]
  rect 1.8x3.2 smd: 1(0,0)
SOD2513X120N [mm]
  rect 1.075x0.5 smd: 1(-1.162,0) 2(1.162,0)
  silkscreen extent -1.7,-0.65 0.85,0.65, body extent -1.25,-0.65 1.25,0.65, height 1.2
SOIC127P600X160-16N [mm]
  rect 1.525x0.7 smd: 1(-2.712,4.445) 2(-2.712,3.175) 3(-2.712,1.905) 4(-2.712,0.635) 5(-2.712,-0.635) 6(-2.712,-1.905) 7(-2.712,-3.175) 8(-2.712,-4.445) 9(2.712,-4.445) 10(2.712,-3.175) 11(2.712,-1.905) 12(2.712,-0.635) 13(2.712,0.635) 14(2.712,1.905) 15(2.712,3.175) 16(2.712,4.445)
  silkscreen extent -3.47,-4.95 1.6,5.15, body extent -3.06,-4.94 3.06,4.94, height 2.05
SOIC127P600X170-9N [mm]
  rect 1.525x0.65 smd: 1(-2.712,1.905) 2(-2.712,0.635) 3(-2.712,-0.635) 4(-2.712,-1.905) 5(2.712,-1.905) 6(2.712,-0.635) 7(2.712,0.635) 8(2.712,1.905)
  rect 2.71x3.4 smd: 9(0,0)
  silkscreen extent -3.47,2.58 -1.95,2.58, body extent -3,-2.45 3,2.45, height 1.7
SON100P300X300X80-7N-D [mm]
  rect 0.85x0.45 smd: 1(-1.45,1) 2(-1.45,0) 3(-1.45,-1) 4(1.45,-1) 5(1.45,0) 6(1.45,1)
  rect 1.6x2.5 smd: 7(0,0)
  silkscreen extent -2,1.6 -1.75,1.85, body extent -1.55,-1.5 1.55,1.5, height 0.8
SOT95P240X110-3N [mm]
  rect 1.15x0.6 smd: 1(-1.1,0.95) 2(-1.1,-0.95) 3(1.1,0)
  silkscreen extent -1.68,-1.45 0.18,1.5, body extent -1.2,-1.45 1.2,1.45, height 1.1
SOT95P280X145-5N [mm]
  rect 1.2x0.6 smd: 1(-1.25,0.95) 2(-1.25,0) 3(-1.25,-0.95) 4(1.25,-0.95) 5(1.25,0.95)
  silkscreen extent -1.85,-1.45 0.3,1.5, body extent -1.4,-1.45 1.4,1.45, height 1.2
SOT229P700X180-4N [mm]
  rect 1.45x0.95 smd: 1(-3.3,2.29) 2(-3.3,0) 3(-3.3,-2.29)
  rect 1.45x3.25 smd: 4(3.3,0)
  silkscreen extent -4.03,-3.25 1.75,3.25, body extent -3.35,-3.15 3.35,3.15, height 1.8
SOTFL50P160X60-8N [mm]
  rect 0.475x0.3 smd: 1(-0.838,0.75) 2(-0.838,0.25) 3(-0.838,-0.25) 4(-0.838,-0.75) 5(0.838,-0.75) 6(0.838,-0.25) 7(0.838,0.25) 8(0.838,0.75)
  silkscreen extent -1.07,-1.05 0.25,1.15, body extent -0.8,-1.02 0.8,1.08, height 0.6
USB4500030A [mm]
  rect 0.6x1.1 smd: A1(-3.2,4) A4(-2.4,4) A9(2.4,4) A12(3.2,4)
  rect 0.3x1.1 smd: A5(-1.25,4) A6(-0.25,4) A7(0.25,4) A8(1.25,4) B5(1.75,4) B6(0.75,4) B7(-0.75,4) B8(-1.75,4)
  oval 1.9x2.28 hole 1.52: MH1(-5.62,2.85) MH2(5.62,2.85)
  oval 1.6x3 hole 1.6: MH3(-5.62,-1.15) MH4(5.62,-1.15)
  silkscreen extent -4.47,-3.25 4.47,5.07, body extent -5.78,-2.95 5.78,4.25, height 2.36

## Part data
AC1: "Accelerometer", Manufacturer_Name=STMicroelectronics, Mouser Part Number=511-LSM6DSOXTR, Arrow Part Number=LSM6DSOXTR, Arrow Price/Stock=https://www.arrow.com/en/products/lsm6dsoxtr/stmicroelectronics?region=europe, Datasheet Link=https://www.st.com/resource/en/datasheet/lsm6dsox.pdf, Manufacturer_Part_Number=LSM6DSOXTR, Mouser Price/Stock=https://www.mouser.co.uk/ProductDetail/STMicroelectronics/LSM6DSOXTR?qs=l7cgNqFNU1i9dcjzItLpVQ%3D%3D
C1 C2 C3 C4 C5 C6 C7 C8 C9 C10 C11 C12 C13 C15 C17 C20 C21 C22 C24 C25 C26 C27 C28 C29 C30 C31 C32 C33 C34 C35 C36 C37 C38 C39 C40 C41 C42 C43 C44 C45 C46 C47 C48 C49 C50 C51 C52 C53 C54 C55 C56 C57 C58 C59 C60 C61 C62 C63 C64 C65 C66 C67 C68 C69 C70: library part Capacitor, "MLCC Capacitor"
C14 C16 C18 C19 C23: "Capacitor Polarised", Manufacturer_Name=Nichicon, Arrow Part Number=UVY1V101MED1TD, Arrow Price/Stock=https://www.arrow.com/en/products/uvy1v101med1td/nichicon, Datasheet Link=http://nichicon-us.com/english/products/pdfs/e-uvy.pdf, Height=12.5mm, Manufacturer_Part_Number=UVY1V101MED1TD
D4 D5 D6 D7 D8 D9 D10: "TVS Diode (Bi-directional)", Manufacturer_Name=LRC, Height=0.7mm, Manufacturer_Part_Number=LESD5D5.0CT1G
IC1: "Integrated Circuit", Manufacturer_Name=BOSCH, Mouser Part Number=262-BMI323, Arrow Part Number=BMI323, Arrow Price/Stock=https://www.arrow.com/en/products/bmi323/bosch?utm_currency=USD&region=nac, Datasheet Link=https://www.bosch-sensortec.com/media/boschsensortec/downloads/datasheets/bst-bmi323-ds000.pdf, Height=0.87mm, Manufacturer_Part_Number=BMI323, Mouser Price/Stock=https://www.mouser.co.uk/ProductDetail/Bosch-Sensortec/BMI323?qs=By6Nw2ByBD3%2FE1v0UqNQPQ%3D%3D
IC2: "Integrated Circuit", Manufacturer_Name="Espressif Systems", Mouser Part Number=356-ESP32S3WRM1N16R8, Datasheet Link=https://www.espressif.com/sites/default/files/documentation/esp32-s3-wroom-1_wroom-1u_datasheet_en.pdf, Height=3.25mm, Manufacturer_Part_Number=ESP32-S3-WROOM-1-N16R8, Mouser Price/Stock=https://www.mouser.co.uk/ProductDetail/Espressif-Systems/ESP32-S3-WROOM-1-N16R8?qs=Li%252BoUPsLEnvQc9gW6AMhZg%3D%3D
IC3 IC4 IC5 IC8: "Integrated Circuit", Manufacturer_Name="Texas Instruments", Mouser Part Number=595-DRV8251DDAR, Arrow Part Number=DRV8251DDAR, Arrow Price/Stock=https://www.arrow.com/en/products/drv8251ddar/texas-instruments?region=nac, Datasheet Link=https://www.arrow.com/en/products/drv8251ddar/texas-instruments?region=nac, Height=1.7mm, Manufacturer_Part_Number=DRV8251DDAR, Mouser Price/Stock=https://www.mouser.co.uk/ProductDetail/Texas-Instruments/DRV8251DDAR?qs=doiCPypUmgHTzZyfapGahQ%3D%3D
IC6: "Integrated Circuit", Manufacturer_Name="Texas Instruments", Mouser Part Number=595-TPS62933DRLR, Arrow Part Number=TPS62933DRLR, Arrow Price/Stock=https://www.arrow.com/en/products/tps62933drlr/texas-instruments?utm_currency=USD&region=nac, Datasheet Link=https://www.ti.com/lit/ds/symlink/tps62933.pdf?ts=1626073394234, Height=0.6mm, Manufacturer_Part_Number=TPS62933DRLR, Mouser Price/Stock=https://www.mouser.co.uk/ProductDetail/Texas-Instruments/TPS62933DRLR?qs=Rp5uXu7WBW9fv47wfQVntQ%3D%3D
IC7 IC11 IC12: "Integrated Circuit", Manufacturer_Name="Lattice Semiconductor", Mouser Part Number=N/A, Datasheet Link=https://www.diodes.com/assets/Datasheets/ds30498.pdf, Height=1.2mm, Manufacturer_Part_Number=BAT760-7, Mouser Price/Stock=https://www.mouser.com/Search/Refine.aspx?Keyword=N%2FA
IC9: library part AMS1117-3.3, "Integrated Circuit", Manufacturer_Name=Advanced, Datasheet Link=https://datasheet.datasheetarchive.com/originals/distributors/Datasheets-28/DSA-550594.pdf, Height=1.8mm, Manufacturer_Part_Number=AMS1117-3.3
IC10: "Integrated Circuit", Manufacturer_Name=Advanced, Datasheet Link=https://datasheet.datasheetarchive.com/originals/distributors/Datasheets-28/DSA-550594.pdf, Height=1.8mm, Manufacturer_Part_Number=AMS1117-3.3
IC13 IC14 IC15 IC16: "Integrated Circuit", Manufacturer_Name=AVIA, Datasheet Link=https://cdn.sparkfun.com/datasheets/Sensors/ForceFlex/hx711_english.pdf, Height=1.6mm, Manufacturer_Part_Number=HX711
IC17: "Integrated Circuit", Manufacturer_Name="Texas Instruments", Mouser Part Number=595-HDC1080DMBR, Arrow Part Number=HDC1080DMBR, Arrow Price/Stock=https://www.arrow.com/en/products/hdc1080dmbr/texas-instruments?region=nac, Datasheet Link=http://www.ti.com/lit/gpn/HDC1080, Height=0.8mm, Manufacturer_Part_Number=HDC1080DMBR, Mouser Price/Stock=https://www.mouser.co.uk/ProductDetail/Texas-Instruments/HDC1080DMBR?qs=8%2FmU9qzJpL9OuhPLRSO9Vg%3D%3D
IC18: "Integrated Circuit", Manufacturer_Name="Texas Instruments", Mouser Part Number=595-ADS1115IRUGR, Arrow Part Number=ADS1115IRUGR, Arrow Price/Stock=https://www.arrow.com/en/products/ads1115irugr/texas-instruments?region=nac, Datasheet Link=https://www.ti.com/lit/ds/symlink/ads1115.pdf?ts=1601235703022&ref_url=https%253A%252F%252Fwww.ti.com%252Fproduct%252FADS1115%253FkeyMatch%253DADS1115IRUGR%2526tisearch%253DSearch-EN-everything%2526usecase%253DOPN, Height=0.4mm, Manufacturer_Part_Number=ADS1115IRUGR, Mouser Price/Stock=https://www.mouser.co.uk/ProductDetail/Texas-Instruments/ADS1115IRUGR?qs=IK5e5L0zOXhqw%2F8AHSSbuA%3D%3D
IC19 IC20 IC21 IC22: "Integrated Circuit", Manufacturer_Name="Texas Instruments", Mouser Part Number=595-INA180A2IDBVR, Arrow Part Number=INA180A2IDBVR, Arrow Price/Stock=https://www.arrow.com/en/products/ina180a2idbvr/texas-instruments?utm_currency=USD&region=nac, Datasheet Link=http://www.ti.com/lit/ds/symlink/ina180.pdf, Height=1.45mm, Manufacturer_Part_Number=INA180A2IDBVR, Mouser Price/Stock=https://www.mouser.co.uk/ProductDetail/Texas-Instruments/INA180A2IDBVR?qs=5aG0NVq1C4wYcJfa99BoHg%3D%3D
J1: "Connector", Manufacturer_Name=HARTING, Mouser Part Number=617-09185066324, Arrow Part Number=09185066324, Arrow Price/Stock=https://www.arrow.com/en/products/09185066324/harting?utm_currency=USD&region=europe, Datasheet Link=https://b2b.harting.com/files/download/PRD/PDF_DS/PDF_DS_09185066324_EN.pdf, Manufacturer_Part_Number=09185066324, Mouser Price/Stock=https://www.mouser.co.uk/ProductDetail/HARTING/09185066324?qs=qa49y27LPCE%2F3ZplMsKEeQ%3D%3D
J2: "Connector", Manufacturer_Name="GCT (GLOBAL CONNECTOR TECHNOLOGY)", Mouser Part Number=640-USB4500030A, Datasheet Link=https://componentsearchengine.com/Datasheets/2/USB4500-03-0-A.pdf, Manufacturer_Part_Number=USB4500-03-0-A, Mouser Price/Stock=https://www.mouser.co.uk/ProductDetail/GCT/USB4500-03-0-A?qs=7D1LtPJG0i2mVyw7UtV%2FkQ%3D%3D
J3: "Connector", Manufacturer_Name=Molex, Mouser Part Number=N/A, Arrow Part Number=0473461001, Arrow Price/Stock=https://www.arrow.com/en/products/0473461001/molex?region=nac, Datasheet Link=https://componentsearchengine.com/Datasheets/1/0473461001.pdf, Height=2.45mm, Manufacturer_Part_Number=0473461001, Mouser Price/Stock=https://www.mouser.co.uk/ProductDetail/Molex/0473461001?qs=2bnkQPT%252BPafTZgGVt%2FOGfA%3D%3D
L1: library part Inductor, "General pourpouse inductor"
Q1: "P-Mosfet 30V 67A Rds(on) 3.1mR"
Q4 Q5 Q8 Q9: "Transistor BJT PNP", Manufacturer_Name=Galaxy, Datasheet Link=https://datasheet.datasheetarchive.com/originals/distributors/Datasheets-3/DSA-49109.pdf, Height=1.1mm, Manufacturer_Part_Number=S8550
R1 R2 R3 R4 R5 R6 R7 R8 R9 R10 R11 R12 R13 R14 R15 R16 R17 R18 R19 R20 R21 R22 R23 R24 R25 R26 R27 R28 R29 R30 R31 R32 R33 R34 R35 R36 R37 R38 R39 R40 R41 R42 R43 R44 R45 R46 R47 R48: library part Resistor, "General pourpouse resistor"
S S1: "Tactile Switch SPST-NO Top Actuated Surface Mount", Package=None, Availability=Unavailable, MF=C&K, MP=PTS810SJK250SMTRLFS, Price=None, SnapEDA_Link=https://www.snapeda.com/parts/PTS810SJK250SMTRLFS/C%26K/view-part/274682/?ref=snap

## Free pads (board coordinates)
  round 6 hole 3.4: 1(90,90) 2(5,90) 3(5,5) 4(90,5)

## Via types
v1: diameter 0.5, hole 0.3, Top Layer to Bottom Layer, tented both sides, 150 vias
v2: diameter 0.4, hole 0.25, Top Layer to Bottom Layer, tented both sides, 110 vias
v3: diameter 0.6, hole 0.3, Top Layer to Bottom Layer, tented both sides, 1 vias

## Nets (pads, with @x,y where several pads share a name; then routed paths per layer and width w, separated by ;. In a path a pad name is that pad's centre, name@x,y a point inside that pad or via, vN(x,y) a via of type N, cw(c..) or ccw(c..) an arc to the next point about the centre after c; other vN are vias at no path point)
3.3V: AC1.5 AC1.8 C6.1 C7.1 C8.1 C9.1 C10.1 C11.1 C12.1 C24.1 C28.1 C29.1 C30.1 C35.1 C36.1 C37.1 C38.1 C39.1 C40.1 C41.1 C42.1 C43.1 C52.1 C53.1 C54.1 C55.1 C64.2 C65.1 C66.1 C67.1 C68.1 C69.1 C70.1 CON19.1 CON20.1 CON23.1 CON24.1 D2.1 IC1.5 IC1.8 IC2.2 IC3.4 IC4.4 IC5.4 IC8.4 IC10.2 IC13.1 IC13.16 IC14.1 IC14.16 IC15.1 IC15.16 IC16.1 IC16.16 IC17.5 IC18.8 IC19.5 IC20.5 IC21.5 IC22.5 J1.2 L1.2 Q4.2 Q5.2 Q8.2 Q9.2 R1.2 R2.2 R3.2 R5.2 R6.1 R8.2 R16.2 R17.2 R32.2 R33.2 R42.2 R47.2 R48.2 | length 573.4
  Top Layer w0.2: v2(18.7,46.7) 20.4,46.7 v1(21.1,46) ; C66.1@34.4,88.884 C66.1@34.416,88.9 ; IC18.8@34.45,90.462 34.45,88.934 C66.1@34.416,88.9 ; R42.2@35.684,93 36.483,93 36.6,92.883 36.6,92.5 ; IC19.5@46.75,91.45 46.75,92.25 46.5,92.5 v1(37.8,92.5) 36.6,92.5 ; C67.1@48.2,91.084 50.784,91.084 v1(50.8,91.1) ; IC21.5@61.05,91.25 61.194,91.394 61.2,91.4 v1(61.2,92.3) ; R16.2@71.3,8.484 v1(71.3,8.5) ; IC1.8@82.05,14.463 82.05,14.476 82.075,14.501 C64.2@84.13,14.501 ; IC1.5@82.213,12.8 C65.1@83.8,12.8 ; AC1.8@89.55,17.05 89.55,17.64 89.725,17.815 89.725,18.241 C9.1@89.8,18.316 C10.1@91.2,18.316 91.2,16.3 C11.1@91.1,16.2 C12.1@91.1,14.8 ; AC1.5@89.7,15.4 89.85,15.4 90.45,14.8 C12.1@91.082,14.8 ; C66.1@34.416,88.9 35.7,88.9 36.6,89.8 36.6,92.5
  Top Layer w0.3: v2(14.405,71.988) 14.517,71.876 14.517,70.976 14.692,70.8 C39.1@15.832,70.8 15.8,70.768 v1(15.8,69.3) ; v1(15.6,88.1) 15.6,86.7 IC22.5@15.65,86.65 15.8,86.5 16.402,86.5 16.6,86.302 C70.1@17.2,86.302 ; C70.1@17.2,86.284 17.216,86.3 18.724,86.3 18.9,86.476 18.9,89.724 19.076,89.9 19.816,89.9 C68.1@19.9,89.816 19.9,89.798 20.248,89.45 IC20.5@21.35,89.45 21.35,90.096 21.5,90.246 v1(21.5,90.3) ; v1(29.05,71.4) 29.05,72.02 29.23,72.2 30.274,72.2 30.45,72.376 30.45,73.284 v1(30.466,73.3) ; C8.1@30.913,3.483 31.245,3.15 C8.1@31.263,3.15 ; L1.2@32.9,11.2 L1.2@33.6,11.9 ; v2(32.9,23.5) 35.8,23.5 39,20.3 39,9.7 37.8,8.5 33,8.5 ; 33.2,5.4 38,5.4 41.1,8.5 41.1,17.6 42.4,18.9 45.8,18.9 ; IC3.4@44.055,71.488 44.838,71.488 45.282,71.932 v1(45.282,72.8) ; IC19.5@46.75,91.45 46.868,91.332 47.568,91.332 47.681,91.219 48.065,91.219 C67.1@48.2,91.084 ; v1(47.6,18.9) 45.8,18.9 ; IC2.2@54.15,30.45 54.116,30.484 R5.2@51.4,30.484 51.4,30.502 50.686,31.216 C30.1@49.5,31.216 C29.1@48.3,31.216 C35.1@47.1,31.216 C28.1@45.9,31.216 45.8,31.116 45.8,18.9 ; IC4.4@58.316,71.494 59.45,71.494 ; v1(59.45,72.4) 59.45,71.494 ; IC21.5@61.194,91.394 62.274,91.394 62.45,91.218 62.45,91.034 C69.1@62.6,90.884 ; v1(62.3,71.5) 62.294,71.494 59.45,71.494 ; v1(74.2,18.9) 74.784,19.484 R1.2@74.784,20.308 ; R1.2@74.768,20.3 74.776,20.308 74.776,21.692 R2.2@74.784,21.7 ; v1(75.5,10.4) 76.2,11.1 79.124,11.1 79.3,10.924 79.3,9.8 ; v1(76.7,71.6) 80.7,71.6 80.8,71.5 ; IC17.5@79.3,8.05 79.3,9.8 ; C24.1@80.8,74.5 80.8,71.5 ; R48.2@81.984,16 84.119,16 ; C64.2@84.116,14.484 C65.1@84.116,12.8 84.079,12.763 84.079,11.179 82.7,9.8 79.3,9.8 ; C64.2@84.132,14.506 84.119,14.519 84.119,16 ; J1.2@88.86,54.26 80.8,62.32 80.8,71.5 ; C9.1@89.8,18.316 84.295,18.316 84.119,18.14 84.119,16 ; C12.1@91.082,14.8 C12.1@91.1,14.8
  Top Layer w0.4: CON19.1@57.4,54.24 CON23.1@60.3,54.24 CON24.1@63.2,54.24 CON20.1@66.1,54.24 ; C24.1@80.933,74.667 80.933,76.833 IC10.2@81,76.9
  Bottom Layer w0.2: IC16.1@13.788,58.355 17.045,58.355 17.8,57.6 21.083,57.6 21.2,57.717 21.2,58.371 R33.2@21.193,58.377 ; IC15.1@13.888,47.955 15,46.843 15,46.817 15.117,46.7 v2(18.7,46.7) 18.7,47.705 18.95,47.955 IC15.16@19.312,47.955 ; v1(21.1,46) 22.884,46 C41.1@22.9,45.984 23.884,45.984 C40.1@23.9,45.968 26.018,45.968 Q4.2@26.2,46.15 Q4.2@26.475,46.15 ; v1(21.5,90.3) 25.991,90.3 29.091,93.4 36.9,93.4 v1(37.8,92.5) ; IC13.1@27.988,47.255 26.792,47.255 26.675,47.138 26.675,46.35 Q4.2@26.475,46.15 ; IC13.16@33.412,47.255 33.216,47.059 R3.2@33.216,46 33.066,46.15 Q4.2@26.475,46.15 ; v1(50.8,91.1) 52.5,92.8 61,92.8 61.161,92.639 61.161,92.339 v1(61.2,92.3)
  Bottom Layer w0.3: IC16.1@13.788,58.355 13.376,58.355 13.171,58.15 Q9.2@12,58.15 11.725,58.15 11.559,57.984 C54.1@9.6,57.984 9.592,57.992 8.608,57.992 C55.1@8.6,58 7.8,58 6.104,59.696 3.2,59.696 ; IC14.1@13.888,36.555 13.85,36.555 13.65,36.355 13.65,35.85 ; IC15.1@13.888,47.955 12.655,47.955 12.25,47.55 Q8.2@10.9,47.55 11,47.45 C53.1@11,46.268 10.992,46.276 10.008,46.276 C52.1@10,46.284 7.384,46.284 6.4,45.3 3.2,45.3 ; v1(15.6,88.1) 14.405,86.905 v2(14.405,71.988) 22.738,71.988 24.05,73.3 v1(30.466,73.3) 32.366,75.2 41.6,75.2 44,72.8 v1(45.282,72.8) 45.282,73.782 45.5,74 57.85,74 v1(59.45,72.4) ; v1(15.8,69.3) 4.2,69.3 3.2,68.3 3.2,59.696 ; IC16.16@19.212,58.355 19.235,58.377 R33.2@21.193,58.377 ; IC14.16@19.312,36.555 19.335,36.578 21.093,36.578 R8.2@21.116,36.6 21.116,35.767 20.94,35.592 16.608,35.592 16.35,35.85 13.65,35.85 ; v3(30.9,3.5) 29.8,4.6 24.7,4.6 3.2,26.1 3.2,35.3 ; v1(47.6,18.9) v1(74.2,18.9) ; 51.5,18.8 51.5,11.9 55.203,8.197 55.8,8.197 ; v1(52.8,3.987) 52.813,4 54.6,4 55.8,5.2 55.8,8.197 ; CON24.1@63.2,54.24 63.2,62.4 62.3,63.3 v1(62.3,71.5) 76.6,71.5 v1(76.7,71.6) ; v1(75.5,10.4) 73.6,8.5 v1(71.3,8.5) 69.5,8.5 69.197,8.197 v1(58.188,8.197) 55.8,8.197 ; 3.2,35.3 3.2,45.3 ; 3.2,35.3 8,35.3 C43.1@8.1,35.4 C42.1@9.1,35.4 10.2,35.4 10.65,35.85 Q5.2@11.8,35.85 13.65,35.85 ; 3.2,45.3 3.2,59.696
5V: C20.1 C25.1 C32.1 C33.1 C34.1 CON17.1 CON18.1 CON21.1 CON22.1 D3.1 IC7.1 IC9.2 IC10.3 IC11.1 IC12.1 | length 201.5
  Top Layer w0.2: IC12.1@70.4,83.538 70.4,83.251 69.7,82.551 C34.1@69.7,81.984 69.537,81.821 69.221,81.821 68.9,81.5 68.9,80.4 69.9,79.4 77.4,79.4 ; v1(70.7,41.5) 70.839,41.639 v1(76.075,41.639) ; IC7.1@75.3,83.538 75.3,82.502 75.8,82.002 C32.1@75.8,81.984 76.916,81.984 77.4,81.5 77.4,79.4 ; IC10.3@83.29,76.9 83.29,77.15 81.04,79.4 77.4,79.4 ; C25.1@85.8,76.835 85.9,76.735 v2(85.9,70.8)
  Top Layer w0.3: IC11.1@84.1,73.162 84.142,73.204 84.142,74.658 C33.1@84.184,74.7 84.237,74.752 84.237,75.45 85.622,76.835 C25.1@85.8,76.835
  Bottom Layer w0.2: v1(27.8,31.4) 27.8,29.3 28.1,29 33.8,29 42.98,19.82 46.8,19.82 ; v1(50.6,3.987) 49.717,3.987 49.6,4.104 49.6,10.3 46.8,13.1 46.8,19.82 ; v1(76.075,41.639) 80.224,37.49 CON17.1@87.6,37.49 87.605,37.495 92.395,37.495 CON18.1@92.4,37.5 92.759,37.141 92.759,36.729 94,35.487 94,31.836 94,25.86 CON22.1@92.4,24.26 CON21.1@87.5,24.26 ; v2(85.9,70.8) 70.7,55.6 70.7,41.433 70.4,41.133 70.4,22.5 67.72,19.82 46.8,19.82
12V: C1.1 C2.1 C3.1 C13.1 C14.1 C15.1 C16.1 C17.1 C18.1 C19.1 C21.1 C22.1 C23.1 D1.1 IC3.5 IC4.5 IC5.5 IC6.3 IC8.5 IC9.3 Q1.1 Q1.2 Q1.3 R19.2 | length 49
  Top Layer w0.2: v1(20.173,10.962) 20.173,2.627 v1(21.1,1.7) ; v1(48.5,3.987) 48.517,3.987 D1.1@48.9,3.605
  Bottom Layer w0.2: v1(19.9,20.3) 20.173,20.027 v1(20.173,10.962) ; v1(21.1,1.7) 21.167,1.7 21.367,1.5 47.2,1.5 48.5,2.8 v1(48.5,3.987) 48.504,3.983 v1@48.683,3.983
  other v1: 54.2,11.416
Battery: IC2.15 R19.1 R20.2 | length 3.3
  Top Layer w0.2: R19.1@54.35,12.734 R19.1@54.2,12.584 R20.2@55.9,12.584 55.9,13.945 IC2.15@55.915,13.96
CLK_HX: CON5.1 CON5.3 CON16.1 CON16.3 IC2.5 IC13.11 IC14.11 IC15.11 IC16.11 | length 99.2
  Top Layer w0.2: v1(16.4,55.9) v1(16.4,59.2) ; v1(17.4,45.3) v1(17.4,48.2)
  Bottom Layer w0.2: v1(16.4,55.9) 16.4,54.7 16.795,54.305 17.4,54.305 ; v1(16.4,59.2) 16.4,64.583 16.517,64.7 19.207,64.7 IC16.11@19.212,64.705 24.405,64.705 25.71,66.01 CON16.1@27.1,66.01 27.11,66 28.013,66 28.13,65.883 28.13,63.47 ; v1(17.4,45.3) 17.4,43.7 18.1,43 19.217,43 IC14.11@19.312,42.905 CON5.1@27,42.905 27.13,42.775 27.725,42.775 27.9,42.6 27.9,40.482 27.783,40.365 ; v1(17.4,48.2) 17.4,54.305 ; IC15.11@19.312,54.305 17.4,54.305 ; CON5.3@27,40.365 27.783,40.365 ; CON16.3@27.1,63.47 28.13,63.47 ; IC13.11@33.412,53.605 31.295,53.605 30.8,54.1 30.8,60.8 29.8,61.8 28.247,61.8 28.13,61.917 28.13,63.47 ; v1(53.7,26.6) 43.88,26.6 30.115,40.365 27.783,40.365
DAT1: CON5.4 IC2.4 IC14.12 | length 40.6
  Top Layer w0.2: CON5.4@27,39.095 33.505,39.095 v1(44.5,28.1)
  Bottom Layer w0.2: IC14.12@19.312,41.635 23.235,41.635 25.775,39.095 CON5.4@27,39.095 ; v1(44.5,28.1) 45.18,27.42 52.72,27.42 53.21,27.91 v1(53.781,27.91)
DAT2: CON5.2 IC2.8 IC13.12 | length 50.4
  Top Layer w0.2: v1(29.8,46.9) 29.8,44.435 CON5.2@27,41.635 32.165,41.635 45.17,28.63 v1(45.17,28.6) ; v1(48.4,24.1) v1(48.4,28)
  Bottom Layer w0.2: v1(29.8,46.9) 29.8,48.723 32.423,51.346 32.423,51.509 32.555,51.642 32.719,51.642 IC13.12@33.412,52.335 ; v1(45.17,28.6) 45.77,28 v1(48.4,28) ; v1(48.4,24.1) 51.4,24.1 52.7,22.8 v1(53.8,22.8)
DAT3: CON16.2 IC2.9 IC15.12 | length 84.9
  Top Layer w0.2: v1(25.6,56.9) 25.6,64.323 26.017,64.74 CON16.2@27.1,64.74 28.543,64.74 28.66,64.623 28.66,61.94 30.35,60.25 34.65,60.25 45.9,49 45.9,48 v1(44.4,46.5) ; v1(41.01,30.51) 41.01,23.79 v1(42.9,21.9)
  Bottom Layer w0.2: IC15.12@19.312,53.035 19.562,53.285 20.585,53.285 24.2,56.9 v1(25.6,56.9) ; v1(41.01,30.51) 41.01,43.11 v1(44.4,46.5) ; v1(42.9,21.9) 43.323,21.477 v1(53.875,21.477)